# EAGLE board v1-pan (EAGLE 6.5.0)
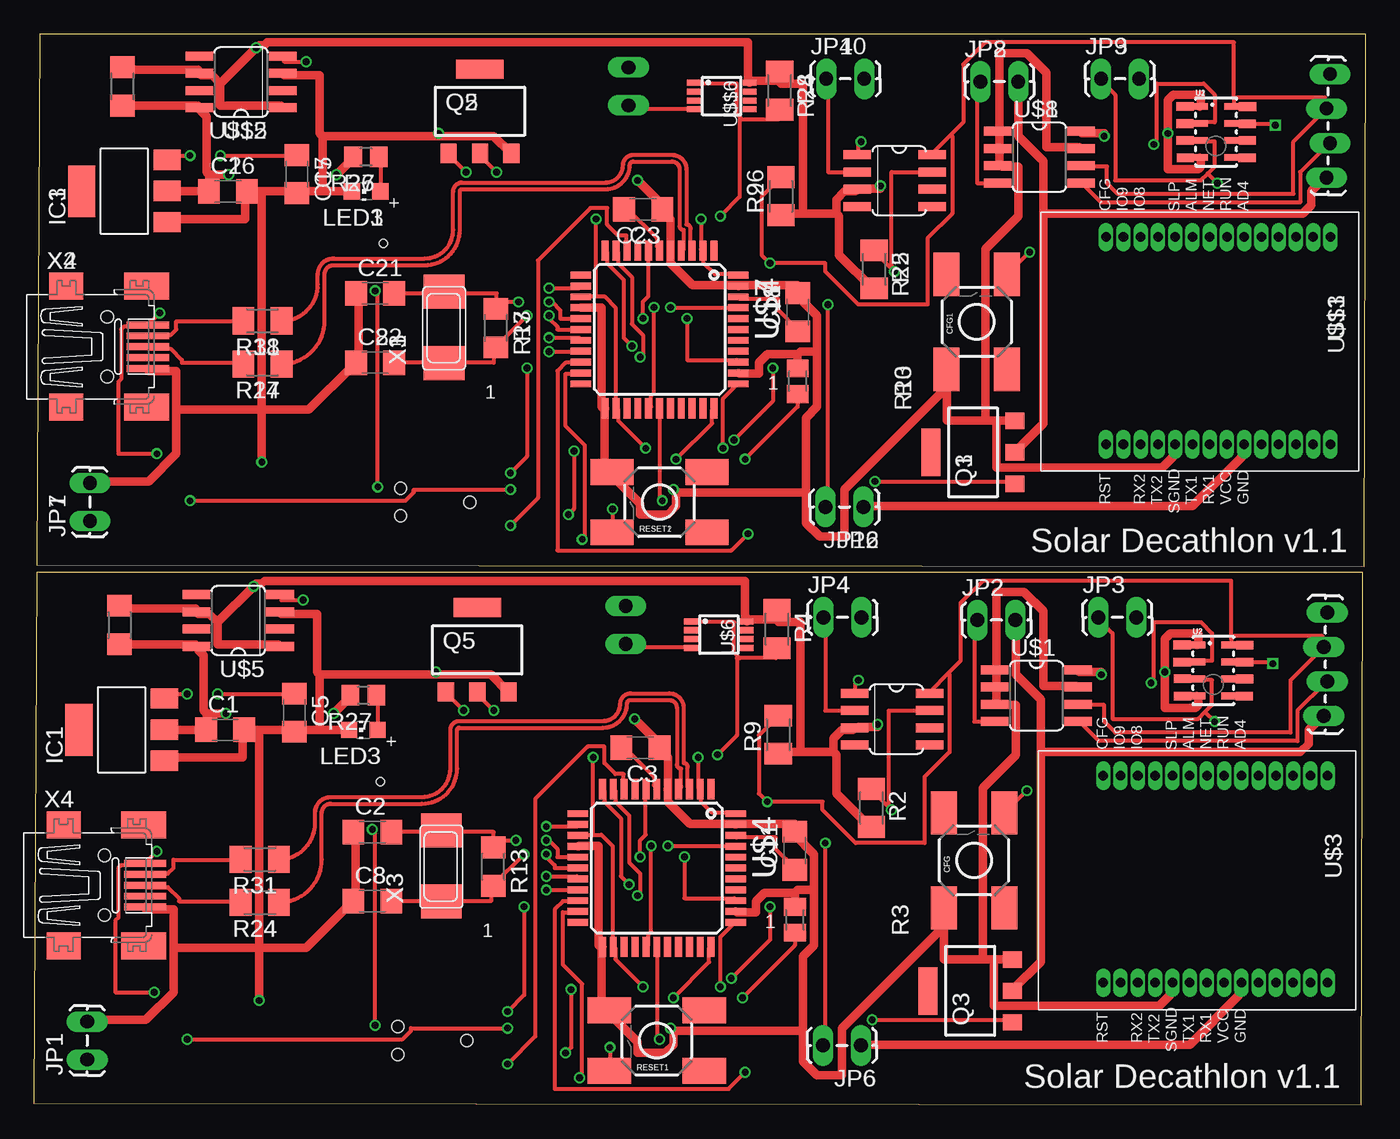
[diagram p0: board, top side]
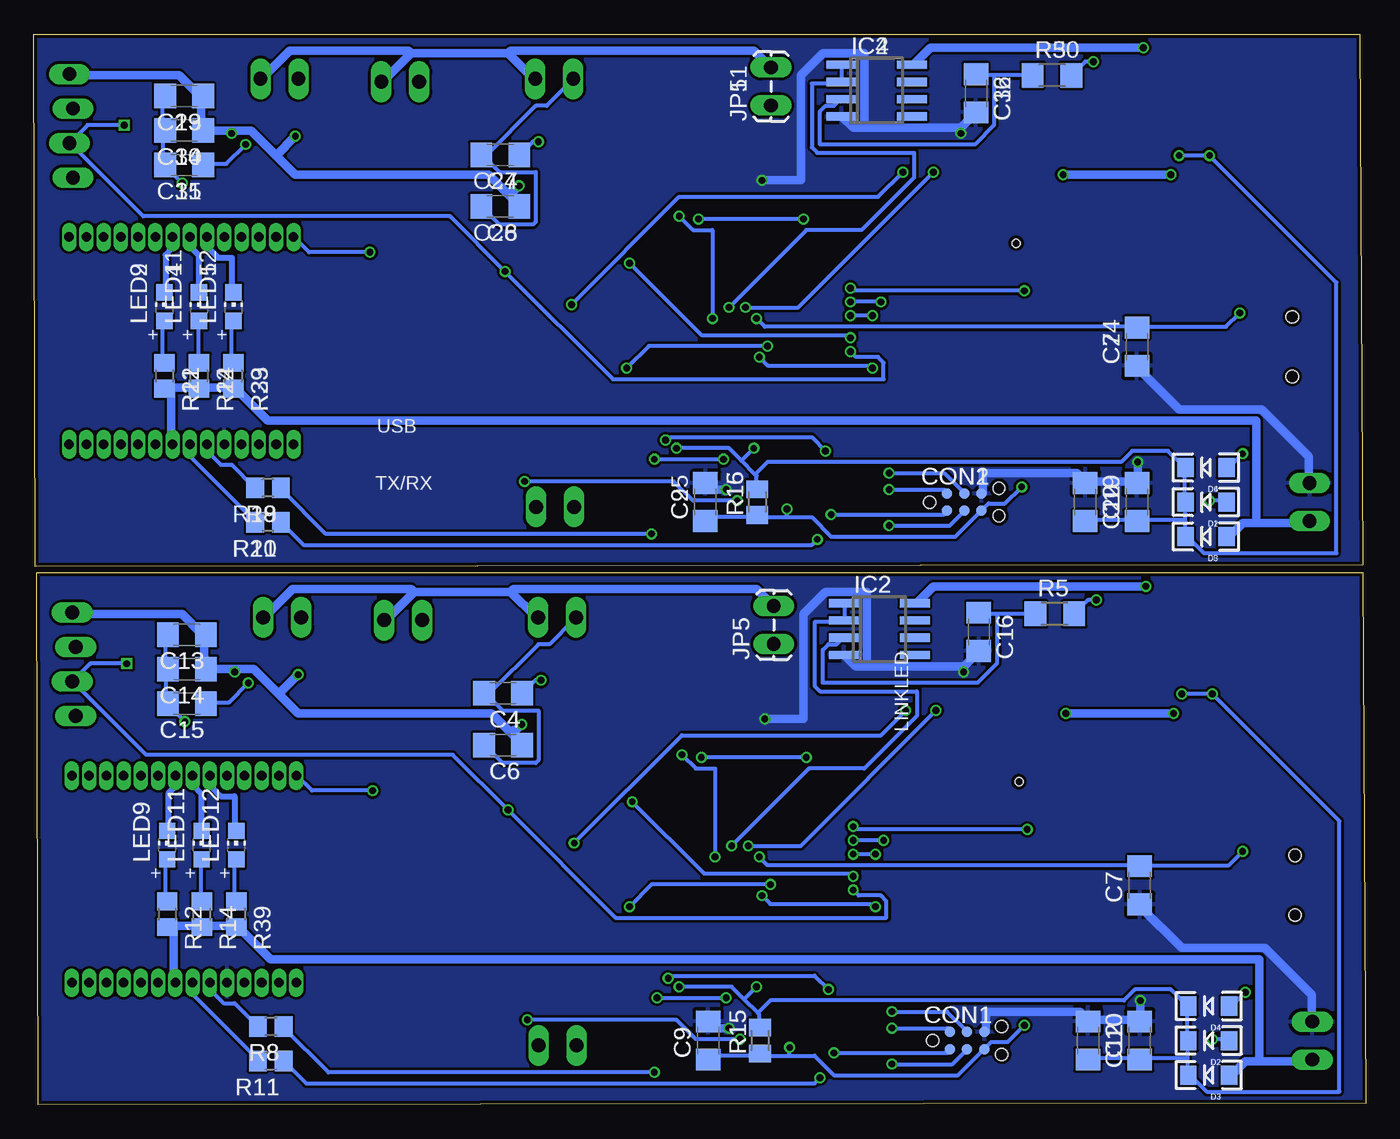
[diagram p1: board, bottom side, seen from below]

Size 97.97 x 78.78 mm. Coordinates in mm from the lower left corner, seen from the top.
Outline: 0,0.1 97.66,0 97.76,39.16 0.2,39.16 0,0.1
Outline: 0.2,39.73 97.87,39.62 97.97,78.78 0.41,78.78 0.2,39.73
Copper layers (1*16): Top 0.035mm / dielectric 1.5mm / Bottom 0.035mm
Design rules "Fusion_eagle_rule_v1.1 *": minimum track width 6mil, minimum drill 0.5mm, track to track 7.5mil, track to pad 7.5mil, pad to pad 7.5mil, via to via 7.5mil, smd to smd 0mil, copper to edge 10mil, drill to drill 10mil, minimum pad ring 6mil, minimum via ring 6mil, stop-mask expansion 2mil, vias tented up to drill 100mil, thermal gap 10mil
Net classes: 0 default: width 0.305 mm; 1 power: width 0.61 mm; 2 VIN: width 0.457 mm; 3 fine: width 0.305 mm; 4 aref: width 0.305 mm
Holes 0.6 mm at 25.5,23.77 25.7,63.4
vRestrict: area 38.2,20 to 53.4,25; area 38.2,9.8 to 53.4,14.9; area 48.4,9.8 to 53.4,25; area 38.2,9.8 to 43.3,25; area 25.5,0.9 to 34.4,8.5; area 38.4,59.6 to 53.6,64.7; area 38.4,49.4 to 53.6,54.5; area 48.6,49.4 to 53.6,64.7; area 38.4,49.4 to 43.5,64.7; area 25.7,40.5 to 34.6,48.2

## Footprints (pad centres in the part's own frame; a part is rotated, then mirrored left to right if it is on the bottom)
C1206 = smd 1.6 x 1.8: 1 -1.4,0; 2 1.4,0
TACTILE_SWITCH_SMD = smd 3.175 x 1.905: 1 -3.493,2.223; 2 3.493,2.223; 3 -3.493,-2.223; 4 3.493,-2.223
TC2030-MCP-NL = smd 0.787 x 0.787: 5V 1.27,0.635; GND 3.81,0.635; MISO 1.27,-0.635; MOSI 2.54,0.635; RESET 3.81,-0.635; SCK 2.54,-0.635 | hole 0.889: 0,0; 5.08,-1.016; 5.08,1.016
LED-1206 = smd 1.2 x 1.4: A -1.5,0; C 1.5,0
SOT223 = smd 1.499 x 2.007: 1 -2.261,-3.15; 2 0.025,-3.15; 3 2.311,-3.15 | smd 3.81 x 2.007: 4 0,3.15
SO08 = smd 0.6 x 2.2: 1 -1.905,-2.6; 2 -0.635,-2.6; 3 0.635,-2.6; 4 1.905,-2.6; 5 1.905,2.6; 6 0.635,2.6; 7 -0.635,2.6; 8 -1.905,2.6
1X02_LOCK_LONGPADS = drill 1.016 long: 1 -0.127,0; 2 2.667,0
1X04_LOCK_LONGPADS = drill 1.016 long: 1 0,0; 2 2.54,-0.254; 3 5.08,0; 4 7.62,-0.254
CHIP-LED0805 = smd 1.2 x 1.2: A 0,-1.05; C 0,1.05
PG-SOT-223 = smd 1.2 x 1.4: 1 -2.311,-3.099; 2 0,-3.099; 3 2.311,-3.099 | smd 3.5 x 1.4: 4 0,3.099
R1206 = smd 1.6 x 1.803: 1 -1.422,0; 2 1.422,0
M1206 = smd 1.6 x 2: 1 -1.4,0; 2 1.4,0
M0805 = smd 1.3 x 1.6: 1 -0.95,0; 2 0.95,0
R0805 = smd 1.3 x 1.5: 1 -0.95,0; 2 0.95,0
LGA8 = smd 1.2 x 0.5: 1 -1.2,1.875; 2 -1.2,0.625; 3 -1.2,-0.625; 4 -1.2,-1.875; 5 1.2,-1.875; 6 1.2,-0.625; 7 1.2,0.625; 8 1.2,1.875 | smd 1.27 x 0.635: P$1 -2.286,1.876; P$2 2.313,1.867; P$3 2.301,0.605; P$4 2.299,-0.617; P$5 2.29,-1.898; P$6 -2.297,0.609; P$7 -2.281,-0.609; P$8 -2.264,-1.901
SO8 = smd 0.66 x 2.032: 1 -3.81,-3.073; 2 -2.54,-3.073; 3 -1.27,-3.073; 4 0,-3.073; 5 0,3.073; 6 -1.27,3.073; 7 -2.54,3.073; 8 -3.81,3.073
CHIPCAP = smd 0.66 x 2.032: 1 -2.54,-3.073; 2 -1.27,-3.073; 3 0,-3.073; 4 1.27,-3.073; 5 1.27,2.438; 6 0,2.438; 7 -1.27,2.438; 8 -2.54,2.438
SZ05-ZIGBEE4 = drill 0.7 pad 1.016 long: AD1 -6.985,6.35; AD2 -6.985,5.08; AD3 -6.985,3.81; AD4 -6.985,2.54; ALM -6.985,-1.27; C485 -6.985,-3.81; CFG -6.985,-7.62; GND 8.255,2.54; IO1 -6.985,8.89; IO2 -6.985,7.62; IO3 8.255,8.89; IO4 8.255,7.62; IO5 8.255,6.35; IO6 8.255,5.08; IO7 8.255,3.81; IO8 -6.985,-5.08; IO9 -6.985,-6.35; MS 8.255,-6.35; NET -6.985,0; RST 8.255,-7.62; RUN -6.985,1.27; RX1 8.255,0; RX2 8.255,-5.08; SLD -6.985,-2.54; SND 8.255,-2.54; TX1 8.255,-1.27; TX2 8.255,-3.81; VCC 8.255,1.27
TQFP44 = smd 1.5 x 0.5: 1 -5.8,4; 2 -5.8,3.2; 3 -5.8,2.4; 4 -5.8,1.6; 5 -5.8,0.8; 6 -5.8,0; 7 -5.8,-0.8; 8 -5.8,-1.6; 9 -5.8,-2.4; 10 -5.8,-3.2; 11 -5.8,-4; 23 5.8,-4; 24 5.8,-3.2; 25 5.8,-2.4; 26 5.8,-1.6; 27 5.8,-0.8; 28 5.8,0; 29 5.8,0.8; 30 5.8,1.6; 31 5.8,2.4; 32 5.8,3.2; 33 5.8,4 | smd 0.5 x 1.5: 12 -4,-5.8; 13 -3.2,-5.8; 14 -2.4,-5.8; 15 -1.6,-5.8; 16 -0.8,-5.8; 17 0,-5.8; 18 0.8,-5.8; 19 1.6,-5.8; 20 2.4,-5.8; 21 3.2,-5.8; 22 4,-5.8; 34 4,5.8; 35 3.2,5.8; 36 2.4,5.8; 37 1.6,5.8; 38 0.8,5.8; 39 0,5.8; 40 -0.8,5.8; 41 -1.6,5.8; 42 -2.4,5.8; 43 -3.2,5.8; 44 -4,5.8
µSOP8 = smd 0.45 x 1: 1 -0.975,-2.05; 2 -0.325,-2.05; 3 0.325,-2.05; 4 0.975,-2.05; 5 0.975,2.05; 6 0.325,2.05; 7 -0.325,2.05; 8 -0.975,2.05
NX6035 = smd 2.5 x 3: P$1 2.665,0; P$2 -2.565,0
32005-201 = smd 3.1 x 0.5: 1 3,1.6; 2 3,0.8; 3 3,0; 4 3,-0.8; 5 3,-1.6 | smd 2.5 x 2: M1 -3,-4.45; M2 -3,4.45 | smd 3.3 x 2: M3 2.9,4.45; M4 2.9,-4.45 | hole 0.9: 0,2.2; 0,-2.2

## Placement (x,y rotation side)
C1  10uF  [C1206]  14.07,27.58 0 top
C2  22pF  [C1206]  24.89,20.07 0 top
C3  100nF  [C1206]  44.62,26.26 180 top
C4  100nF  [C1206]  63.45,30.28 180 bottom
C5  10uF  [C1206]  19.15,28.85 270 top
C6  220nF  [C1206]  63.45,26.47 180 bottom
C7  10uF  [C1206]  16.61,16.15 90 bottom
C8  22pF  [C1206]  24.89,14.99 0 top
C9  100nF  [C1206]  48.36,4.72 90 bottom
C10  10uF  [C1206]  16.61,4.72 90 bottom
C11  100nF  [C1206]  55.98,18.69 90 top
C12  100nF  [C1206]  20.42,4.72 270 bottom
C13  100nF  [C1206]  86.72,34.59 180 bottom
C14  10uF  [C1206]  86.72,32.05 180 bottom
C15  100nF  [C1206]  86.72,29.51 180 bottom
C16  150nF  [C1206]  28.45,34.8 270 bottom
C17  10uF  [C1206]  19.35,68.48 270 top
C18  100nF  [C1206]  56.18,58.32 90 top
C19  10uF  [C1206]  16.81,44.35 90 bottom
C20  100nF  [C1206]  20.62,44.35 270 bottom
C21  22pF  [C1206]  25.1,59.69 0 top
C22  22pF  [C1206]  25.1,54.61 0 top
C23  100nF  [C1206]  44.82,65.89 180 top
C24  10uF  [C1206]  16.81,55.78 90 bottom
C25  100nF  [C1206]  48.56,44.35 90 bottom
C26  10uF  [C1206]  14.27,67.21 0 top
C27  100nF  [C1206]  63.65,69.9 180 bottom
C28  220nF  [C1206]  63.65,66.09 180 bottom
C29  100nF  [C1206]  86.92,74.22 180 bottom
C30  10uF  [C1206]  86.92,71.68 180 bottom
C31  100nF  [C1206]  86.92,69.14 180 bottom
C32  150nF  [C1206]  28.65,74.42 270 bottom
CFG  Configure  [TACTILE_SWITCH_SMD]  69.16,17.98 90 top
CFG1  Configure  [TACTILE_SWITCH_SMD]  69.37,57.61 90 top
CON1  SPI  [TC2030-MCP-NL]  31.85,4.72 0 bottom
CON2  SPI  [TC2030-MCP-NL]  32.05,44.35 0 bottom
D1  1N581D1206  [LED-1206]  11.73,44.35 180 bottom
D2  1N581D1206  [LED-1206]  11.53,4.72 180 bottom
D3  1N581D1206  [LED-1206]  11.53,2.18 180 bottom
D4  1N581D1206  [LED-1206]  11.53,7.26 180 bottom
D5  1N581D1206  [LED-1206]  11.73,41.81 180 bottom
D6  1N581D1206  [LED-1206]  11.73,46.89 180 bottom
IC1  REG1117  [SOT223]  6.45,27.58 90 top
IC2  TL072D  [SO08]  35.76,35 270 bottom
IC3  REG1117  [SOT223]  6.65,67.21 90 top
IC4  TL072D  [SO08]  35.97,74.63 270 bottom
JP1  [1X02_LOCK_LONGPADS]  3.91,3.45 90 top
JP2  [1X02_LOCK_LONGPADS]  69.55,35.66 0 top
JP3  [1X02_LOCK_LONGPADS]  78.44,35.86 0 top
JP4  [1X02_LOCK_LONGPADS]  58.22,35.86 0 top
JP5  [1X02_LOCK_LONGPADS]  43.54,34.04 90 bottom
JP6  [1X02_LOCK_LONGPADS]  60.71,4.37 180 top
JP7  [1X02_LOCK_LONGPADS]  4.11,43.08 90 top
JP8  [1X02_LOCK_LONGPADS]  69.75,75.29 0 top
JP9  [1X02_LOCK_LONGPADS]  78.64,75.49 0 top
JP10  [1X02_LOCK_LONGPADS]  58.42,75.49 0 top
JP11  [1X02_LOCK_LONGPADS]  43.74,73.66 90 bottom
JP12  [1X02_LOCK_LONGPADS]  60.91,43.99 180 top
JP13  [1X04_LOCK_LONGPADS]  95.15,36.22 270 top
JP14  [1X04_LOCK_LONGPADS]  95.35,75.84 270 top
LED1  RED  [CHIP-LED0805]  24.43,67.21 90 top
LED2  RED  [CHIP-LED0805]  88.37,58.72 0 bottom
LED3  RED  [CHIP-LED0805]  24.23,27.58 90 top
LED4  RED  [CHIP-LED0805]  85.83,58.72 0 bottom
LED5  RED  [CHIP-LED0805]  83.29,58.72 0 bottom
LED9  RED  [CHIP-LED0805]  88.16,19.1 0 bottom
LED11  RED  [CHIP-LED0805]  85.62,19.1 0 bottom
LED12  RED  [CHIP-LED0805]  83.08,19.1 0 bottom
Q1  BSP75  [PG-SOT-223]  69.09,48.01 90 top
Q2  BSP75  [PG-SOT-223]  32.82,73.1 0 top
Q3  BSP75  [PG-SOT-223]  68.88,8.38 90 top
Q5  BSP75  [PG-SOT-223]  32.61,33.48 0 top
R1  50m  [R1206]  6.3,35.31 90 top
R2  10k  [M1206]  61.62,21.84 270 top
R3  10k  [M0805]  55.98,13.61 270 top
R4  4.7k  [M1206]  54.66,35 270 top
R5  10k  [R1206]  22.86,36.12 0 bottom
R6  1K  [R0805]  24.43,69.75 180 top
R7  1M  [R1206]  33.99,57.15 270 top
R8  1K  [R0805]  80.54,5.77 180 bottom
R9  10k  [M1206]  54.76,27.23 90 top
R10  10k  [M0805]  56.18,53.24 270 top
R11  1K  [R0805]  80.54,3.23 180 bottom
R12  1K  [R0805]  88.16,14.02 270 bottom
R13  1M  [R1206]  33.78,17.53 270 top
R14  1K  [R0805]  85.62,14.02 270 bottom
R15  10k  [M0805]  44.55,4.72 90 bottom
R16  10k  [M0805]  44.75,44.35 90 bottom
R17  22  [M1206]  16.81,54.51 180 top
R18  22  [M1206]  16.81,57.68 180 top
R19  1K  [R0805]  80.75,45.39 180 bottom
R20  1K  [R0805]  80.75,42.85 180 bottom
R21  1K  [R0805]  88.37,53.64 270 bottom
R22  1K  [R0805]  85.83,53.64 270 bottom
R23  1K  [R0805]  83.29,53.64 270 bottom
R24  22  [M1206]  16.61,14.88 180 top
R25  10k  [M1206]  61.82,61.47 270 top
R26  10k  [M1206]  54.97,66.85 90 top
R27  1K  [R0805]  24.23,30.12 180 top
R28  4.7k  [M1206]  54.86,74.63 270 top
R29  50m  [R1206]  6.5,74.93 90 top
R30  10k  [R1206]  23.06,75.74 0 bottom
R31  22  [M1206]  16.61,18.06 180 top
R39  1K  [R0805]  83.08,14.02 270 bottom
RESET1  Reset uC  [TACTILE_SWITCH_SMD]  45.82,4.72 180 top
RESET2  Reset uC  [TACTILE_SWITCH_SMD]  46.02,44.35 180 top
U1  MPL3115A2LGA8  [LGA8]  86.97,71.58 0 top
U2  MPL3115A2LGA8  [LGA8]  86.77,31.95 0 top
U$1  M24512  [SO8]  73.76,28.19 270 top
U$2  CHIPCAP  [CHIPCAP]  63.45,27.74 270 top
U$3  SZ05-ZIGBEETHROUGHHOLE  [SZ05-ZIGBEE4]  86.3,17.23 270 top
U$4  ATMEGA32U4-AU  [TQFP44]  45.82,17.42 270 top
U$5  MAX4376F  [SO8]  15.04,37.54 90 top
U$6  DS1820  [µSOP8]  50.39,34.59 270 top
U$7  ATMEGA32U4-AU  [TQFP44]  46.02,57.05 270 top
U$8  M24512  [SO8]  73.96,67.82 270 top
U$9  CHIPCAP  [CHIPCAP]  63.65,67.36 270 top
U$10  DS1820  [µSOP8]  50.6,74.22 270 top
U$11  SZ05-ZIGBEETHROUGHHOLE  [SZ05-ZIGBEE4]  86.5,56.86 270 top
U$12  MAX4376F  [SO8]  15.24,77.17 90 top
X1  16MHz  [NX6035]  30.18,57.15 90 top
X2  MINI-USB  [32005-201]  5.38,55.78 0 top
X3  16MHz  [NX6035]  29.97,17.53 90 top
X4  MINI-USB  [32005-201]  5.18,16.15 0 top

## Library data of the parts
C1-C32 R1 R5-R8 R11-R14 R19-R23 R27 R29 R30 R39 = rcl
CFG CFG1 CON1 CON2 D1-D6 RESET1 RESET2 U$1-U$3 U$5 U$8 U$9 U$11 U$12 X1 X3 = lpatiny
IC1 IC3 = burr-brown; MPN: REG1117; OC_FARNELL: 1097566; OC_NEWARK: 14P6981
IC2 IC4 = linear
JP1-JP14 = SparkFun
LED1-LED5 LED9 LED11 LED12 U$4 U$7 = adafruit
Q1-Q3 Q5 = infineon; OC_FARNELL: unknown; OC_NEWARK: unknown
R2-R4 R9 R10 R15-R18 R24-R26 R28 R31 = resistor
U1 U2 = SparkFun-Sensors-hacked
U$6 U$10 = Ava
X2 X4 = con-cypressindustries; OC_FARNELL: unknown; OC_NEWARK: unknown

## Nets
3.3IN [power]: C1.1 IC1.2 R1.1 R27.2 U$5.8
3.3IN1 [power]: C26.1 IC3.2 R6.2 R29.1 U$12.8
3.3V [power]: C6.1 C13.1 C14.1 IC2.8 JP13.1 R1.2 R2.2 R4.1 R9.1 U2.1 U2.4 U$1.8 U$2.3 U$5.1 U$5.6 U$6.8
3.3V1 [power]: C28.1 C29.1 C30.1 IC4.8 JP14.1 R25.2 R26.1 R28.1 R29.2 U1.1 U1.4 U$8.8 U$9.3 U$10.8 U$12.1 U$12.6
$1: C13.2 C14.2 C15.2 JP3.1 U2.3
$2: C4.2 C6.2 JP4.1 U$2.2
$3: JP5.1 U$6.4
$4: JP8.1 U$8.4
$5: JP11.1 U$10.4
$6: C29.2 C30.2 C31.2 JP9.1 U1.3
$7: C27.2 C28.2 JP10.1 U$9.2
$12: JP2.1 U$1.4
+5V [power]: D3.A JP1.1 R12.2 R14.2 R39.2 U$3.VCC
+5V1 [power]: D5.A JP7.1 R21.2 R22.2 R23.2 U$11.VCC
A0: R4.2 U$4.36 U$6.1
A1: U$4.37
A2: U$4.38
A3: U$4.39
A4: U$4.40
A5: IC2.1 IC2.2 U$4.41
A6: U$7.38
A7: U$7.39
A8: U$7.40
A9: IC4.1 IC4.2 U$7.41
A10: U$7.37
A11: R28.2 U$7.36 U$10.1
AREF: C11.1 U$4.42
AREF1: C18.1 U$7.42
CS: U$4.25
CS1: U$7.25
D5*: U$4.31
D5*1: U$7.31
D6*: Q5.1 U$4.27
D6*1: Q2.1 U$7.27
D7*: U$4.1
D7*1: U$7.1
D8*: Q3.1 U$4.28
D8*1: Q1.1 U$7.28
D9*: U$4.29
D9*1: U$7.29
D10*: U$4.30
D10*1: U$7.30
D11*: U$4.12
D11*1: U$7.12
D12*: U$4.26
D12*1: U$7.26
D13*: U$4.32
D13*1: U$7.32
D+USB: R24.2 X4.3
D+USB1: R17.2 X2.3
D-USB: R31.2 X4.2
D-USB1: R18.2 X2.2
GND [power]: C1.2 C2.1 C3.1 C5.2 C7.1 C8.1 C9.2 C10.2 C11.2 C12.1 C16.2 CFG.1 CON1.GND IC1.1 IC2.4 JP1.2 LED3.C Q3.3 Q5.3 R3.1 RESET1.4 U$1.1 U$1.2 U$1.3 U$1.7 U$3.SND U$4.5 U$4.15 U$4.23 U$4.35 U$4.43 U$5.3 X4.5
GND1 [VIN]: LED9.C U$3.RUN
GND2 [VIN]: LED11.C U$3.NET
GND3 [VIN]: LED12.C U$3.ALM
GND4 [power]: C17.2 C18.2 C19.2 C20.1 C21.1 C22.1 C23.1 C24.1 C25.2 C26.2 C32.2 CFG1.1 CON2.GND IC3.1 IC4.4 JP7.2 LED1.C Q1.3 Q2.3 R10.1 RESET2.4 U$7.5 U$7.15 U$7.23 U$7.35 U$7.43 U$8.1 U$8.2 U$8.3 U$8.7 U$11.SND U$12.3 X2.5
GND5 [VIN]: LED2.C U$11.RUN
GND6 [VIN]: LED4.C U$11.NET
GND7 [VIN]: LED5.C U$11.ALM
GND_CONTROLLED [power]: JP2.2 JP3.2 JP4.2 JP5.2 JP13.4 Q3.2
GND_CONTROLLED1 [power]: JP8.2 JP9.2 JP10.2 JP11.2 JP14.4 Q1.2
HWB: R3.2 U$4.33
HWB1: R10.2 U$7.33
ISP+5V: CON1.5V D2.A
ISP+5V1: CON2.5V D1.A
MISO: CON1.MISO U$4.11
MISO1: CON2.MISO U$7.11
MOSI: CON1.MOSI U$4.10
MOSI1: CON2.MOSI U$7.10
N$1: R5.2 U$5.4
N$2: JP6.2 Q5.2
N$3: C16.1 IC2.3 R5.1
N$4: C22.2 R7.2 U$7.17 X1.P$2
N$5: LED1.A R6.1
N$6: C4.1 U$2.1
N$7: C23.2 U$7.6
N$8 [power]: JP6.1 U$3.GND
N$9: R20.2 U$11.RX1
N$10: R19.2 U$11.TX1
N$11: R11.2 U$3.RX1
N$12: LED2.A R21.1
N$13: C15.1 U2.2
N$14: LED4.A R22.1
N$15: LED5.A R23.1
N$16: C3.2 U$4.6
N$17: CFG1.4 U$11.CFG
N$18: C27.1 U$9.1
N$19: C31.1 U1.2
N$20: LED3.A R27.1
N$21 [power]: JP12.1 U$11.GND
N$22: JP12.2 Q2.2
N$23: R30.2 U$12.4
N$24: R8.2 U$3.TX1
N$25: LED9.A R12.1
N$26: LED11.A R14.1
N$27: LED12.A R39.1
N$28: C32.1 IC4.3 R30.1
N$35: CFG.4 U$3.CFG
N$42: C8.2 R13.2 U$4.17 X3.P$2
RD_N: R31.1 U$4.3
RD_N1: R18.1 U$7.3
RD_P: R24.1 U$4.4
RD_P1: R17.1 U$7.4
RESET: C9.1 CON1.RESET R15.1 RESET1.2 U$4.13
RESET1: C25.1 CON2.RESET R16.1 RESET2.2 U$7.13
RX: R8.1 U$4.20
RX1: R19.1 U$7.20
RXLED: U$4.8
RXLED1: U$7.8
SCK: CON1.SCK U$4.9
SCK1: CON2.SCK U$7.9
SCL: JP13.2 R9.2 U2.8 U$1.6 U$2.8 U$4.18
SCL1: JP14.2 R26.2 U1.8 U$7.18 U$8.6 U$9.8
SDA: JP13.3 R2.1 U2.7 U$1.5 U$2.7 U$4.19
SDA1: JP14.3 R25.1 U1.7 U$7.19 U$8.5 U$9.7
TX: R11.1 U$4.21
TX1: R20.1 U$7.21
TXLED: U$4.22
TXLED1: U$7.22
VCC [fine]: C5.1 C10.1 C12.2 D2.C D3.C D4.C IC1.3 R15.2 U$4.2 U$4.14 U$4.24 U$4.34 U$4.44
VCC1 [fine]: C17.1 C19.1 C20.2 D1.C D5.C D6.C IC3.3 R16.2 U$7.2 U$7.14 U$7.24 U$7.34 U$7.44
VUSB: C7.2 D4.A U$4.7 X4.1
VUSB1: C24.2 D6.A U$7.7 X2.1
XTAL1: C2.2 R13.1 U$4.16 X3.P$1
XTAL2: C21.2 R7.1 U$7.16 X1.P$1

## Tracks (layer width: path | path; a pad name or v marks a point on that pad's centre or on a via)
3.3IN  (via drill 0.5)
  Top 0.61: R1.1 6.4,33.88 11.89,33.88 U$5.8 12.09,33.48 12.5,33.07 12.5,29.01 12.7,28.8 | v22.05,28.8 23.27,30.02 R27.2 | 12.7,28.8 v14.12,28.8 | 12.7,28.8 12.7,27.58 C1.1 9.65,27.58 IC1.2
  Bottom 0.61: v14.12,28.8 v22.05,28.8
3.3IN1  (via drill 0.5)
  Top 0.61: R29.1 6.6,73.51 12.09,73.51 U$12.8 12.29,73.1 12.7,72.69 12.7,68.63 12.9,68.43 | v22.25,68.43 23.47,69.65 R6.2 | 12.9,68.43 v14.33,68.43 | 12.9,68.43 12.9,67.21 C26.1 9.86,67.21 IC3.2
  Bottom 0.61: v14.33,68.43 v22.25,68.43
3.3V  (via drill 0.5)
  Top 0.61: R1.2 6.4,36.53 11.89,36.53 11.89,36.32 U$5.6 12.09,36.12 12.9,36.12 13.51,35.51 | 13.51,35.51 13.51,33.88 17.98,33.88 U$5.1 | 13.51,35.51 v16.15,38.15 16.36,38.35 16.76,38.35 16.97,38.56 52.32,38.56 52.32,35.92 52.53,35.71 | 54.56,35.71 52.53,35.71 | 54.56,35.71 54.56,36.32 R4.1 | 52.53,35.71 U$6.8 | 58.83,25.96 56.39,25.96 | 56.39,25.96 54.76,25.96 R9.1 | 58.83,25.96 58.83,26.97 59.44,27.58 60.25,27.58 U$2.3 60.66,27.79 62.08,27.79 v62.08,27.99 | R2.2 61.47,20.47 59.03,22.91 59.03,25.76 58.83,25.96 | 56.39,25.96 56.39,35.51 54.76,35.51 54.56,35.71 | U2.4 85.65,30.02 85.65,29.41 85.45,29.21 83.21,29.21 v83.21,31.85 83.21,34.29 83.62,34.7 85.65,34.7 85.65,33.88 U2.1 | v78.54,31.65 78.54,31.85 76.91,31.85 U$1.8
  Bottom 0.61: v16.15,38.15 31.8,38.15 33.02,36.93 IC2.8 | 62.89,27.38 64.31,28.8 78.54,28.8 79.96,30.23 | 62.89,27.38 62.08,26.57 C6.1 | 79.96,30.23 81.79,32.05 83.21,32.05 | 83.21,32.05 C14.1 85.45,32.26 85.45,34.49 C13.1 85.65,34.7 87.07,36.12 95,36.12 JP13.1 | 79.96,30.23 v78.54,31.65 | v83.21,31.85 83.21,32.05 | v62.08,27.99 62.48,27.58 62.69,27.58 62.89,27.38
3.3V1  (via drill 0.5)
  Top 0.61: R29.2 6.6,76.15 12.09,76.15 12.09,75.95 U$12.6 12.29,75.74 13.11,75.74 13.72,75.13 | 13.72,75.13 13.72,73.51 18.19,73.51 U$12.1 | 13.72,75.13 v16.36,77.77 16.56,77.98 16.97,77.98 17.17,78.18 52.53,78.18 52.53,75.54 52.73,75.34 | 54.76,75.34 52.73,75.34 | 54.76,75.34 54.76,75.95 R28.1 | 52.73,75.34 U$10.8 | 59.03,65.58 56.59,65.58 | 56.59,65.58 54.97,65.58 R26.1 | 59.03,65.58 59.03,66.6 59.64,67.21 60.45,67.21 U$9.3 60.86,67.41 62.28,67.41 v62.28,67.61 | R25.2 61.67,60.1 59.23,62.53 59.23,65.38 59.03,65.58 | 56.59,65.58 56.59,75.13 54.97,75.13 54.76,75.34 | U1.4 85.85,69.65 85.85,69.04 85.65,68.83 83.41,68.83 v83.41,71.48 83.41,73.91 83.82,74.32 85.85,74.32 85.85,73.51 U1.1 | v78.74,71.27 78.74,71.48 77.11,71.48 U$8.8
  Bottom 0.61: v16.36,77.77 32,77.77 33.22,76.56 IC4.8 | 63.09,67.01 64.52,68.43 78.74,68.43 80.16,69.85 | 63.09,67.01 62.28,66.19 C28.1 | 80.16,69.85 81.99,71.68 83.41,71.68 | 83.41,71.68 C30.1 85.65,71.88 85.65,74.12 C29.1 85.85,74.32 87.27,75.74 95.2,75.74 JP14.1 | 80.16,69.85 v78.74,71.27 | v83.41,71.48 83.41,71.68 | v62.28,67.61 62.69,67.21 62.89,67.21 63.09,67.01
$1  (via drill 0.5)
  Top 0.305: 86.16,28.91 85.65,28.4 79.35,28.4 79.35,34.7 78.33,35.71 JP3.1 | 86.16,28.91 86.66,29.41 86.66,31.24 85.65,31.24 U2.3 | 86.16,28.91 v86.87,28.19
  Bottom 0.305: 88.29,32.05 88.29,29.62 C15.2 88.09,29.41 v86.87,28.19 | 88.29,32.05 88.29,34.49 C13.2 | 88.29,32.05 C14.2
$2
  Top 0.305: U$2.2 58.22,29.01 58.22,35.71 JP4.1
  Bottom 0.305: C6.2 64.72,26.37 63.5,25.15 61.06,25.15 60.86,25.35 60.86,29.01 63.5,29.01 64.72,30.23 C4.2 64.52,30.23 60.86,33.88 60.05,33.88 58.22,35.71 JP4.1
$3
  Top 0.305: U$6.4 48.26,33.68 43.59,33.68 43.59,33.88 JP5.1
$4
  Top 0.305: U$8.4 69.39,67.82 69.39,74.93 69.6,75.13 JP8.1
$5
  Top 0.305: U$10.4 48.46,73.3 43.79,73.3 43.79,73.51 JP11.1
$6  (via drill 0.5)
  Top 0.305: 86.36,68.53 85.85,68.02 79.55,68.02 79.55,74.32 78.54,75.34 JP9.1 | 86.36,68.53 86.87,69.04 86.87,70.87 85.85,70.87 U1.3 | 86.36,68.53 v87.07,67.82
  Bottom 0.305: 88.49,71.68 88.49,69.24 C31.2 88.29,69.04 v87.07,67.82 | 88.49,71.68 88.49,74.12 C29.2 | 88.49,71.68 C30.2
$7
  Top 0.305: U$9.2 58.42,68.63 58.42,75.34 JP10.1
  Bottom 0.305: C28.2 64.92,65.99 63.7,64.77 61.26,64.77 61.06,64.97 61.06,68.63 63.7,68.63 64.92,69.85 C27.2 64.72,69.85 61.06,73.51 60.25,73.51 58.42,75.34 JP10.1
$12
  Top 0.305: U$1.4 69.19,28.19 69.19,35.31 69.39,35.51 JP2.1
+5V
  Bottom 0.61: 7.82,3.2 3.96,3.2 JP1.1 | 7.82,3.2 8.84,3.2 9.86,2.18 D3.A | U$3.VCC 87.68,9.09 87.68,12.95 R12.2 88.09,13.16 85.85,13.16 R14.2 85.45,13.16 83.21,13.16 R39.2 82.8,12.95 80.57,10.72 7.82,10.72 7.82,3.2
+5V1
  Bottom 0.61: 8.03,42.82 4.17,42.82 JP7.1 | 8.03,42.82 9.04,42.82 10.06,41.81 D5.A | U$11.VCC 87.88,48.72 87.88,52.58 R21.2 88.29,52.78 86.06,52.78 R22.2 85.65,52.78 83.41,52.78 R23.2 83.01,52.58 80.77,50.34 8.03,50.34 8.03,42.82
A0  (via drill 0.5)
  Top 0.305: 51.82,32.97 51.92,32.87 54.56,32.87 54.56,33.48 R4.2 | 51.82,32.97 51.51,33.27 51.51,35.51 48.46,35.51 U$6.1 | v47.85,18.24 47.85,15.19 51.51,15.19 U$4.36 | v50.29,25.76 51.71,27.18 51.71,32.87 51.82,32.97
  Bottom 0.305: v47.85,18.24 47.85,24.74 49.28,24.74 v50.29,25.76
A5  (via drill 0.5)
  Top 0.305: v46.63,19.05 51.51,19.05 U$4.41
  Bottom 0.305: v46.63,19.05 40.94,24.74 36.88,24.74 33.02,28.6 33.02,30.43 40.13,30.43 40.54,30.84 40.54,35.51 38.51,35.51 IC2.2 38.3,35.71 38.3,36.73 IC2.1
A9  (via drill 0.5)
  Top 0.305: v46.84,58.67 51.71,58.67 U$7.41
  Bottom 0.305: v46.84,58.67 41.15,64.36 37.08,64.36 33.22,68.22 33.22,70.05 40.34,70.05 40.74,70.46 40.74,75.13 38.71,75.13 IC4.2 38.51,75.34 38.51,76.35 IC4.1
A11  (via drill 0.5)
  Top 0.305: 52.02,72.59 52.12,72.49 54.76,72.49 54.76,73.1 R28.2 | 52.02,72.59 51.71,72.9 51.71,75.13 48.67,75.13 U$10.1 | v48.06,57.86 48.06,54.81 51.71,54.81 U$7.36 | v50.5,65.38 51.92,66.8 51.92,72.49 52.02,72.59
  Bottom 0.305: v48.06,57.86 48.06,64.36 49.48,64.36 v50.5,65.38
AREF
  Top 0.305: U$4.42 51.71,19.66 54.56,19.66 54.56,18.85 55.98,17.42 C11.1
AREF1
  Top 0.305: U$7.42 51.92,59.28 54.76,59.28 54.76,58.47 56.18,57.05 C18.1
D6*  (via drill 0.5)
  Top 0.305: v31.6,29.01 30.38,30.23 Q5.1 | v45.42,19.05 45.42,12.75 45.21,12.55 45.21,11.73 U$4.27
  Bottom 0.305: v31.6,29.01 41.55,19.05 v45.42,19.05
D6*1  (via drill 0.5)
  Top 0.305: v31.8,68.63 30.58,69.85 Q2.1 | v45.62,58.67 45.62,52.37 45.42,52.17 45.42,51.36 U$7.27
  Bottom 0.305: v31.8,68.63 41.76,58.67 v45.62,58.67
D8*  (via drill 0.5)
  Top 0.305: v61.67,6.25 71.83,6.25 Q3.1 | v46.02,4.83 45.82,5.03 U$4.28
  Bottom 0.305: v61.67,6.25 50.7,6.25 49.28,4.83 v46.02,4.83
D8*1  (via drill 0.5)
  Top 0.305: v61.87,45.87 72.03,45.87 Q1.1 | v46.23,44.45 46.02,44.65 U$7.28
  Bottom 0.305: v61.87,45.87 50.9,45.87 49.48,44.45 v46.23,44.45
D+USB
  Top 0.305: R24.2 15.14,14.99 10.67,14.99 10.67,15.19 9.86,16 8.23,16 X4.3
D+USB1
  Top 0.305: R17.2 15.34,54.61 10.87,54.61 10.87,54.81 10.06,55.63 8.43,55.63 X2.3
D-USB
  Top 0.305: R31.2 15.14,18.03 10.26,18.03 10.26,17.42 9.86,17.02 8.23,17.02 X4.2
D-USB1
  Top 0.305: R18.2 15.34,57.66 10.46,57.66 10.46,57.05 10.06,56.64 8.43,56.64 X2.2
GND  (via drill 0.5)
  Top 0.61: C2.1 23.67,20.07 23.67,14.99 C8.1 23.27,14.78 20.02,11.53 16.56,11.53 | 10.26,11.53 10.26,8.28 8.23,6.25 3.96,6.25 JP1.2 | 10.26,11.53 10.26,14.38 8.23,14.38 X4.5 | 10.26,11.53 16.56,11.53 | 16.56,11.53 v16.56,7.67 | 9.65,25.35 IC1.1 9.86,25.55 15.34,25.55 15.34,27.38 C1.2 16.56,27.58 | 21.03,27.58 19.2,27.58 C5.2 19,27.58 16.56,27.58 | 21.03,27.58 LED3.C | 21.03,31.65 29.57,31.65 | 29.57,31.65 33.63,31.65 34.85,30.43 Q5.3 | 21.03,27.58 21.03,31.65 | U$5.3 18.19,36.12 20.83,36.12 20.83,31.85 21.03,31.65 | v29.57,31.85 29.57,31.65 | 16.56,27.58 16.56,11.53 | 41.76,11.53 41.76,7.47 42.16,7.06 RESET1.4 42.37,6.65 44.4,4.62 44.4,3.81 46.43,3.81 47.04,4.42 47.04,5.44 | 41.76,11.53 U$4.23 | U$4.15 40.13,19.05 41.55,19.05 41.55,11.73 41.76,11.53 | 47.04,5.44 v46.84,5.64 | 55.98,15.6 53.75,15.6 53.14,14.99 53.14,14.17 51.71,14.17 U$4.35 | R3.1 55.98,15.6 | 57.4,15.8 56.18,15.8 55.98,15.6 | 57.4,15.8 57.4,18.44 55.98,19.86 C11.2 55.98,20.68 51.71,20.68 U$4.43 51.51,20.68 48.26,20.68 46.63,22.3 46.63,23.11 U$4.5 46.63,23.32 46.63,25.55 46.02,26.16 C3.1 46.02,26.57 v44.2,28.4 | 56.59,5.44 47.04,5.44 | 56.59,5.44 56.59,10.92 57.4,11.73 57.4,15.8 | U$1.7 76.71,30.84 74.27,30.84 74.27,36.32 72.85,37.74 70.82,37.74 70.82,32.26 U$1.1 70.82,31.85 70.82,30.84 U$1.2 70.82,30.63 70.82,29.62 U$1.3 71.02,29.41 72.24,29.41 72.24,25.76 69.8,23.32 69.8,10.72 | 69.8,10.72 66.95,10.72 66.95,14.38 CFG.1 66.75,12.95 59.44,5.64 59.44,2.18 57.61,2.18 56.59,3.2 56.59,5.44 | 69.8,10.72 70.61,10.72 | 70.61,10.72 71.83,10.72 Q3.3 | 70.61,10.72 70.61,7.26 82.8,7.26 83.62,8.08 83.62,8.89 U$3.SND
  Bottom 0.61: CON1.GND 27.94,5.44 27.94,6.86 21.03,6.86 20.42,6.25 C12.1 20.22,6.25 16.76,6.25 C10.2 16.56,6.45 v16.56,7.67 | C7.1 16.56,14.58 13.51,11.53 7.42,11.53 3.96,8.08 3.96,6.25 JP1.2 | 29.57,32.26 28.55,33.27 C16.2 | 36.68,32.26 37.49,32.26 38.3,33.07 IC2.4 | 36.68,32.26 29.57,32.26 | v29.57,31.85 29.57,32.26 | v46.84,5.64 47.85,5.64 48.26,6.05 C9.2 | 36.68,32.26 36.68,37.74 39.73,37.74 41.35,36.12 41.35,28.4 v44.2,28.4
  pour Bottom: 0.2,39.17 97.94,39.17 97.94,-0.56 0.1,-0.56 0.1,39.17
GND1
  Bottom 0.457: LED9.C 88.09,20.27 88.09,22.91 87.68,23.32 87.68,24.13 U$3.RUN
GND2
  Bottom 0.457: LED11.C 85.65,20.27 85.65,22.91 86.26,23.52 86.26,24.13 U$3.NET
GND3
  Bottom 0.457: LED12.C 83.21,20.27 83.21,22.71 84.23,22.71 84.84,23.32 84.84,24.13 U$3.ALM
GND4  (via drill 0.5)
  Top 0.61: C21.1 23.88,59.69 23.88,54.61 C22.1 23.47,54.41 20.22,51.16 16.76,51.16 | 10.46,51.16 10.46,47.9 8.43,45.87 4.17,45.87 JP7.2 | 10.46,51.16 10.46,54 8.43,54 X2.5 | 10.46,51.16 16.76,51.16 | 16.76,51.16 v16.76,47.29 | 9.86,64.97 IC3.1 10.06,65.18 15.54,65.18 15.54,67.01 C26.2 16.76,67.21 | 21.23,67.21 19.41,67.21 C17.2 19.2,67.21 16.76,67.21 | 21.23,67.21 LED1.C | 21.23,71.27 29.77,71.27 | 29.77,71.27 33.83,71.27 35.05,70.05 Q2.3 | 21.23,67.21 21.23,71.27 | U$12.3 18.39,75.74 21.03,75.74 21.03,71.48 21.23,71.27 | v29.77,71.48 29.77,71.27 | 16.76,67.21 16.76,51.16 | 41.96,51.16 41.96,47.09 42.37,46.69 RESET2.4 42.57,46.28 44.6,44.25 44.6,43.43 46.63,43.43 47.24,44.04 47.24,45.06 | 41.96,51.16 U$7.23 | U$7.15 40.34,58.67 41.76,58.67 41.76,51.36 41.96,51.16 | 47.24,45.06 v47.04,45.26 | 56.18,55.22 53.95,55.22 53.34,54.61 53.34,53.8 51.92,53.8 U$7.35 | R10.1 56.18,55.22 | 57.61,55.42 56.39,55.42 56.18,55.22 | 57.61,55.42 57.61,58.06 56.18,59.49 C18.2 56.18,60.3 51.92,60.3 U$7.43 51.71,60.3 48.46,60.3 46.84,61.93 46.84,62.74 U$7.5 46.84,62.94 46.84,65.18 46.23,65.79 C23.1 46.23,66.19 v44.4,68.02 | 56.79,45.06 47.24,45.06 | 56.79,45.06 56.79,50.55 57.61,51.36 57.61,55.42 | U$8.7 76.91,70.46 74.47,70.46 74.47,75.95 73.05,77.37 71.02,77.37 71.02,71.88 U$8.1 71.02,71.48 71.02,70.46 U$8.2 71.02,70.26 71.02,69.24 U$8.3 71.22,69.04 72.44,69.04 72.44,65.38 70,62.94 70,50.34 | 70,50.34 67.16,50.34 67.16,54 CFG1.1 66.95,52.58 59.64,45.26 59.64,41.81 57.81,41.81 56.79,42.82 56.79,45.06 | 70,50.34 70.82,50.34 | 70.82,50.34 72.03,50.34 Q1.3 | 70.82,50.34 70.82,46.89 83.01,46.89 83.82,47.7 83.82,48.51 U$11.SND
  Bottom 0.61: CON2.GND 28.14,45.06 28.14,46.48 21.23,46.48 20.62,45.87 C20.1 20.42,45.87 16.97,45.87 C19.2 16.76,46.08 v16.76,47.29 | C24.1 16.76,54.2 13.72,51.16 7.62,51.16 4.17,47.7 4.17,45.87 JP7.2 | 29.77,71.88 28.75,72.9 C32.2 | 36.88,71.88 37.69,71.88 38.51,72.69 IC4.4 | 36.88,71.88 29.77,71.88 | v29.77,71.48 29.77,71.88 | v47.04,45.26 48.06,45.26 48.46,45.67 C25.2 | 36.88,71.88 36.88,77.37 39.93,77.37 41.55,75.74 41.55,68.02 v44.4,68.02
  pour Bottom: 0.41,78.79 98.15,78.79 98.15,39.07 0.3,39.07 0.3,78.79
GND5
  Bottom 0.457: LED2.C 88.29,59.89 88.29,62.53 87.88,62.94 87.88,63.75 U$11.RUN
GND6
  Bottom 0.457: LED4.C 85.85,59.89 85.85,62.53 86.46,63.14 86.46,63.75 U$11.NET
GND7
  Bottom 0.457: LED5.C 83.41,59.89 83.41,62.33 84.43,62.33 85.04,62.94 85.04,63.75 U$11.ALM
GND_CONTROLLED
  Top 0.61: 74.07,25.96 74.07,29.82 72.24,31.65 72.24,35.51 JP2.2 | 74.07,25.96 74.07,10.52 72.03,8.48 Q3.2 | 74.07,25.96 93.17,25.96 93.78,26.57 93.78,27.58 94.79,28.6 JP13.4
  Bottom 0.61: 62.89,37.74 61.06,35.92 JP4.2 | 70,37.74 62.89,37.74 | 70,37.74 72.03,35.71 JP2.2 | JP3.2 80.98,35.92 78.94,37.95 70.21,37.95 70,37.74 | JP5.2 43.59,36.73 44.81,37.95 62.69,37.95 62.89,37.74
GND_CONTROLLED1
  Top 0.61: 74.27,65.58 74.27,69.44 72.44,71.27 72.44,75.13 JP8.2 | 74.27,65.58 74.27,50.14 72.24,48.11 Q1.2 | 74.27,65.58 93.37,65.58 93.98,66.19 93.98,67.21 95,68.22 JP14.4
  Bottom 0.61: 63.09,77.37 61.26,75.54 JP10.2 | 70.21,77.37 63.09,77.37 | 70.21,77.37 72.24,75.34 JP8.2 | JP9.2 81.18,75.54 79.15,77.57 70.41,77.57 70.21,77.37 | JP11.2 43.79,76.35 45.01,77.57 62.89,77.57 63.09,77.37
HWB  (via drill 0.5)
  Top 0.305: v47.04,7.87 49.68,10.52 49.68,11.53 U$4.33 | v52.12,7.87 55.98,11.73 R3.2
  Bottom 0.305: v52.12,7.87 v47.04,7.87
HWB1  (via drill 0.5)
  Top 0.305: v47.24,47.5 49.89,50.14 49.89,51.16 U$7.33 | v52.32,47.5 56.18,51.36 R10.2
  Bottom 0.305: v52.32,47.5 v47.24,47.5
ISP+5V  (via drill 0.5)
  Top 0.305: v34.85,5.64 27.74,5.64 27.74,5.44 27.13,4.83 v11.28,4.83
  Bottom 0.305: v34.85,5.64 30.78,5.64 30.58,5.44 CON1.5V | v11.28,4.83 10.06,4.83 D2.A
ISP+5V1  (via drill 0.5)
  Top 0.305: v35.05,45.26 27.94,45.26 27.94,45.06 27.33,44.45 v11.48,44.45
  Bottom 0.305: v35.05,45.26 30.99,45.26 30.78,45.06 CON2.5V | v11.48,44.45 10.26,44.45 D1.A
MISO  (via drill 0.5)
  Top 0.305: v39.12,3.81 39.52,4.22 v39.52,8.48 | v51.31,9.3 54.15,12.14 v54.15,14.58 | v43.79,16.21 43.18,16.81 43.18,21.08 41.96,22.3 41.96,23.11 U$4.11
  Bottom 0.305: v39.12,3.81 30.78,3.81 30.58,4.01 CON1.MISO | v39.52,8.48 40.54,9.5 51.1,9.5 v51.31,9.3 | v54.15,14.58 52.53,16.21 v43.79,16.21
MISO1  (via drill 0.5)
  Top 0.305: v39.32,43.43 39.73,43.84 v39.73,48.11 | v51.51,48.92 54.36,51.77 v54.36,54.2 | v43.99,55.83 43.38,56.44 43.38,60.71 42.16,61.93 42.16,62.74 U$7.11
  Bottom 0.305: v39.32,43.43 30.99,43.43 30.78,43.64 CON2.MISO | v39.73,48.11 40.74,49.12 51.31,49.12 v51.51,48.92 | v54.36,54.2 52.73,55.83 v43.99,55.83
MOSI  (via drill 0.5)
  Top 0.305: v34.85,6.86 36.07,8.08 v36.07,14.58 | v44.4,15.39 44.6,15.6 44.6,17.02 43.79,17.83 43.79,21.29 42.77,22.3 42.77,23.11 U$4.10
  Bottom 0.305: v34.85,6.86 30.78,6.86 29.36,5.44 CON1.MOSI | v36.07,14.58 36.27,14.78 43.79,14.78 v44.4,15.39
MOSI1  (via drill 0.5)
  Top 0.305: v35.05,46.48 36.27,47.7 v36.27,54.2 | v44.6,55.02 44.81,55.22 44.81,56.64 43.99,57.45 43.99,60.91 42.98,61.93 42.98,62.74 U$7.10
  Bottom 0.305: v35.05,46.48 30.99,46.48 29.57,45.06 CON2.MOSI | v36.27,54.2 36.47,54.41 43.99,54.41 v44.6,55.02
N$1  (via drill 0.5)
  Top 0.305: v19.81,37.13 18.19,37.13 18.19,37.54 U$5.4
  Bottom 0.305: R5.2 20.42,37.13 v19.81,37.13 | R5.2
N$2  (via drill 0.5)
  Top 0.305: v33.83,29.01 32.61,30.23 Q5.2 | v58.22,19.25 58.22,4.42 JP6.2
  Bottom 0.305: v33.83,29.01 35.66,27.18 50.29,27.18 v58.22,19.25
N$3
  Bottom 0.305: R5.1 27.13,36.12 | 27.13,36.12 28.35,36.12 C16.1 | 27.13,36.12 27.13,32.46 28.55,31.04 39.93,31.04 39.93,33.48 39.52,33.88 38.91,33.88 38.51,34.29 IC2.3
N$4  (via drill 0.5)
  Top 0.305: 30.18,54.61 C22.2 | U$7.17 38.51,57.05 38.51,57.25 37.9,57.86 v37.9,58.06 | v36.27,58.06 34.04,55.83 R7.2 33.83,55.63 33.83,54.61 30.18,54.61 | 30.18,54.61 X1.P$2
  Bottom 0.305: v36.27,58.06 v37.9,58.06
N$5
  Top 0.305: LED1.A 25.5,67.21 25.5,69.65 R6.1
N$6  (via drill 0.5)
  Top 0.305: v60.66,31.24 60.45,31.04 60.45,30.43 U$2.1
  Bottom 0.305: v60.66,31.24 61.06,31.24 61.87,30.43 C4.1
N$7
  Top 0.305: U$7.6 46.02,62.94 45.82,63.14 45.82,63.75 43.59,65.99 C23.2
N$8
  Top 0.61: U$3.GND 88.7,8.89 88.7,8.08 85.04,4.42 60.86,4.42 JP6.1
N$9
  Bottom 0.305: R20.2 81.79,43.03 86.46,47.7 86.46,48.51 U$11.RX1
N$10
  Bottom 0.305: R19.2 81.79,45.47 83.41,47.09 84.23,47.09 85.04,47.9 85.04,48.51 U$11.TX1
N$11
  Bottom 0.305: R11.2 81.58,3.4 86.26,8.08 86.26,8.89 U$3.RX1
N$12
  Bottom 0.305: LED2.A 88.49,57.66 88.49,54.61 R21.1
N$13  (via drill 0.5)
  Top 0.305: v82.19,31.04 82.4,31.24 82.4,35.51 85.85,35.51 86.66,34.7 86.66,32.66 85.65,32.66 U2.2
  Bottom 0.305: v82.19,31.04 83.62,29.62 85.24,29.62 C15.1
N$14
  Bottom 0.305: LED4.A 85.85,57.66 85.85,54.61 R22.1
N$15
  Bottom 0.305: LED5.A 83.41,57.66 83.41,54.61 R23.1
N$16
  Top 0.305: U$4.6 45.82,23.32 45.62,23.52 45.62,24.13 43.38,26.37 C3.2
N$17  (via drill 0.5)
  Top 0.305: v73.25,62.74 71.63,61.11 CFG1.4
  Bottom 0.305: v73.25,62.74 77.72,62.74 78.74,63.75 U$11.CFG
N$18  (via drill 0.5)
  Top 0.305: v60.86,70.87 60.66,70.66 60.66,70.05 U$9.1
  Bottom 0.305: v60.86,70.87 61.26,70.87 62.08,70.05 C27.1
N$19  (via drill 0.5)
  Top 0.305: v82.4,70.66 82.6,70.87 82.6,75.13 86.06,75.13 86.87,74.32 86.87,72.29 85.85,72.29 U1.2
  Bottom 0.305: v82.4,70.66 83.82,69.24 85.45,69.24 C31.1
N$20
  Top 0.305: LED3.A 25.3,27.58 25.3,30.02 R27.1
N$21
  Top 0.61: U$11.GND 88.9,48.51 88.9,47.7 85.24,44.04 61.06,44.04 JP12.1
N$22  (via drill 0.5)
  Top 0.305: v34.04,68.63 32.82,69.85 Q2.2 | v58.42,58.88 58.42,44.04 JP12.2
  Bottom 0.305: v34.04,68.63 35.86,66.8 50.5,66.8 v58.42,58.88
N$23  (via drill 0.5)
  Top 0.305: v20.02,76.76 18.39,76.76 18.39,77.17 U$12.4
  Bottom 0.305: v20.02,76.76 20.62,76.76 R30.2
N$24
  Bottom 0.305: R8.2 81.58,5.84 83.21,7.47 84.02,7.47 84.84,8.28 84.84,8.89 U$3.TX1
N$25
  Bottom 0.305: LED9.A 88.29,18.03 88.29,14.99 R12.1
N$26
  Bottom 0.305: LED11.A 85.65,18.03 85.65,14.99 R14.1
N$27
  Bottom 0.305: LED12.A 83.21,18.03 83.21,14.99 R39.1
N$28
  Bottom 0.305: R30.1 27.33,75.74 | 27.33,75.74 28.55,75.74 C32.1 | 27.33,75.74 27.33,72.09 28.75,70.66 40.13,70.66 40.13,73.1 39.73,73.51 39.12,73.51 38.71,73.91 IC4.3
N$35  (via drill 0.5)
  Top 0.305: v73.05,23.11 71.42,21.49 CFG.4
  Bottom 0.305: v73.05,23.11 77.52,23.11 78.54,24.13 U$3.CFG
N$42  (via drill 0.5)
  Top 0.305: 29.97,14.99 C8.2 | U$4.17 38.3,17.42 38.3,17.63 37.69,18.24 v37.69,18.44 | v36.07,18.44 33.83,16.21 R13.2 33.63,16 33.63,14.99 29.97,14.99 | 29.97,14.99 X3.P$2
  Bottom 0.305: v36.07,18.44 v37.69,18.44
RD_N
  Top 0.305: R31.1 arc90 20.68,20.73 20.68,21.49 arc-90 21.84,22.65 28.55,22.65 arc90 30.64,24.74 30.64,27.58 arc-90 31.29,28.24 41.86,28.24 arc90 43.14,29.51 arc-90 43.89,30.27 46.74,30.27 arc-90 47.8,29.21 47.8,25.15 arc-90 48.1,24.84 48.1,23.34 arc90 U$4.3
RD_N1
  Top 0.305: R18.1 arc90 20.89,60.35 20.89,61.11 arc-90 22.05,62.27 28.75,62.27 arc90 30.84,64.36 30.84,67.21 arc-90 31.5,67.86 42.06,67.86 arc90 43.34,69.14 arc-90 44.09,69.89 46.94,69.89 arc-90 48,68.83 48,64.77 arc-90 48.3,64.47 48.3,62.97 arc90 U$7.3
RD_P
  Top 0.305: R24.1 arc90 21.18,18.05 21.18,21.49 arc-90 21.84,22.16 28.55,22.16 arc90 31.13,24.74 31.13,27.58 arc-90 31.29,27.74 41.86,27.74 arc90 43.63,29.51 arc-90 43.89,29.78 46.74,29.78 arc-90 47.3,29.21 47.3,25.04 arc90 47.61,24.74 47.61,23.41 arc-90 U$4.4
RD_P1
  Top 0.305: R17.1 arc90 21.38,57.67 21.38,61.11 arc-90 22.05,61.78 28.75,61.78 arc90 31.34,64.36 31.34,67.21 arc-90 31.5,67.37 42.06,67.37 arc90 43.83,69.14 arc-90 44.09,69.4 46.94,69.4 arc-90 47.5,68.83 47.5,64.67 arc90 47.81,64.36 47.81,63.03 arc-90 U$7.4
RESET  (via drill 0.5)
  Top 0.305: v37.69,20.47 39.93,20.47 U$4.13 | v24.89,20.27 25.1,20.07 v25.1,5.84 | v42.37,4.22 42.37,2.59 RESET1.2
  Bottom 0.305: 42.37,3.61 44.4,3.61 R15.1 44.6,3.61 48.06,3.61 48.26,3.4 C9.1 | 42.37,3.61 40.54,3.61 39.12,2.18 29.97,2.18 28.14,4.01 CON1.RESET 27.94,4.22 27.53,4.62 26.31,4.62 v25.1,5.84 | v37.69,20.47 37.49,20.27 v24.89,20.27 | 42.37,3.61 v42.37,4.22
RESET1  (via drill 0.5)
  Top 0.305: v37.9,60.1 40.13,60.1 U$7.13 | v25.1,59.89 25.3,59.69 v25.3,45.47 | v42.57,43.84 42.57,42.21 RESET2.2
  Bottom 0.305: 42.57,43.23 44.6,43.23 R16.1 44.81,43.23 48.26,43.23 48.46,43.03 C25.1 | 42.57,43.23 40.74,43.23 39.32,41.81 30.18,41.81 28.35,43.64 CON2.RESET 28.14,43.84 27.74,44.25 26.52,44.25 v25.3,45.47 | v37.9,60.1 37.69,59.89 v25.1,59.89 | 42.57,43.23 v42.57,43.84
RX  (via drill 0.5)
  Top 0.305: v52.32,2.39 51.1,1.17 38.3,1.17 38.3,14.38 38.91,14.99 39.93,14.99 U$4.20
  Bottom 0.305: v52.32,2.39 76.3,2.39 79.55,5.64 R8.1
RX1  (via drill 0.5)
  Top 0.305: v52.53,42.01 51.31,40.79 38.51,40.79 38.51,54 39.12,54.61 40.13,54.61 U$7.20
  Bottom 0.305: v52.53,42.01 76.5,42.01 79.76,45.26 R19.1
SCK  (via drill 0.5)
  Top 0.305: v34.85,3 36.88,5.03 36.88,22.5 40.74,26.37 41.96,26.37 41.96,25.15 42.77,24.33 43.38,24.33 43.38,23.32 U$4.9
  Bottom 0.305: v34.85,3 30.38,3 29.36,4.01 CON1.SCK
SCK1  (via drill 0.5)
  Top 0.305: v35.05,42.62 37.08,44.65 37.08,62.13 40.94,65.99 42.16,65.99 42.16,64.77 42.98,63.96 43.59,63.96 43.59,62.94 U$7.9
  Bottom 0.305: v35.05,42.62 30.58,42.62 29.57,43.64 CON2.SCK
SCL  (via drill 0.5)
  Top 0.305: v37.69,16.81 39.93,16.81 U$4.18 | R9.2 54.76,28.6 53.34,27.18 53.34,22.91 v53.95,22.3 58.01,22.3 58.01,21.69 60.45,19.25 65.53,19.25 65.53,24.13 67.36,25.96 67.36,31.65 67.26,31.75 | 88.19,34.39 88.29,34.49 94.79,34.49 94.79,33.68 JP13.2 92.46,31.24 92.46,27.38 79.55,27.38 78.74,28.19 78.74,29.41 76.91,29.41 U$1.6 | 88.19,34.39 88.09,34.29 88.09,33.88 U2.8 | 67.26,31.75 68.17,32.66 68.17,36.93 69.8,38.56 88.09,38.56 88.09,34.49 88.19,34.39 | 67.26,31.75 65.94,30.43 U$2.8
  Bottom 0.305: v37.69,16.81 37.9,17.02 48.67,17.02 v53.95,22.3
SCL1  (via drill 0.5)
  Top 0.305: v37.9,56.44 40.13,56.44 U$7.18 | R26.2 54.97,68.22 53.54,66.8 53.54,62.53 v54.15,61.93 58.22,61.93 58.22,61.32 60.66,58.88 65.74,58.88 65.74,63.75 67.56,65.58 67.56,71.27 67.46,71.37 | 88.39,74.02 88.49,74.12 95,74.12 95,73.3 JP14.2 92.66,70.87 92.66,67.01 79.76,67.01 78.94,67.82 78.94,69.04 77.11,69.04 U$8.6 | 88.39,74.02 88.29,73.91 88.29,73.51 U1.8 | 67.46,71.37 68.38,72.29 68.38,76.56 70,78.18 88.29,78.18 88.29,74.12 88.39,74.02 | 67.46,71.37 66.14,70.05 U$9.8
  Bottom 0.305: v37.9,56.44 38.1,56.64 48.87,56.64 v54.15,61.93
SDA  (via drill 0.5)
  Top 0.305: U$1.5 76.91,28.19 78.33,26.77 92.96,26.77 92.96,29.01 95,31.04 JP13.3 | v37.69,15.8 39.93,15.8 U$4.19 | 62.79,22 61.67,23.11 R2.1 | 62.79,22 v63.09,21.69 | U$2.7 62.89,29.01 62.89,22.1 62.79,22 | U2.7 91.02,32.58 v91.14,32.46
  Bottom 0.305: v37.69,15.8 37.29,15.39 35.66,15.39 35.26,14.99 35.26,13.77 55.17,13.77 v63.09,21.69 67.16,25.76 89.71,25.76 95,31.04 JP13.3 93.83,32.46 v91.14,32.46
SDA1  (via drill 0.5)
  Top 0.305: U$8.5 77.11,67.82 78.54,66.4 93.17,66.4 93.17,68.63 95.2,70.66 JP14.3 | v37.9,55.42 40.13,55.42 U$7.19 | 62.99,61.62 61.87,62.74 R25.1 | 62.99,61.62 v63.3,61.32 | U$9.7 63.09,68.63 63.09,61.72 62.99,61.62 | U1.7 91.22,72.2 v91.34,72.09
  Bottom 0.305: v37.9,55.42 37.49,55.02 35.86,55.02 35.46,54.61 35.46,53.39 55.37,53.39 v63.3,61.32 67.36,65.38 89.92,65.38 95.2,70.66 JP14.3 94.03,72.09 v91.34,72.09
TX  (via drill 0.5)
  Top 0.305: v40.13,1.98 40.34,2.18 40.34,8.89 38.91,10.31 38.91,14.17 39.93,14.17 U$4.21
  Bottom 0.305: v40.13,1.98 40.54,1.57 77.93,1.57 79.55,3.2 R11.1
TX1  (via drill 0.5)
  Top 0.305: v40.34,41.61 40.54,41.81 40.54,48.51 39.12,49.94 39.12,53.8 40.13,53.8 U$7.21
  Bottom 0.305: v40.34,41.61 40.74,41.2 78.13,41.2 79.76,42.82 R20.1
VCC  (via drill 0.5)
  Top 0.305: v50.5,8.69 50.5,12.34 51.51,13.36 U$4.34 | U$4.44 51.51,21.49 49.89,21.49 49.07,22.3 49.07,23.11 U$4.2 48.87,23.32 v48.87,25.55 | 41.15,19.86 40.13,19.86 U$4.14 | 41.15,19.86 41.76,19.86 42.57,19.05 42.57,11.73 U$4.24 42.77,11.53 42.77,10.72 v44.81,8.69 | 41.15,19.86 v41.15,25.55 | v13.51,30.23 19,30.23 C5.1 | v11.28,30.23 9.65,30.23 9.65,30.02 IC1.3
  Bottom 0.305: v50.5,8.69 46.63,8.69 45.72,7.77 | 44.7,6.76 44.6,6.65 44.6,5.84 R15.2 | 44.7,6.76 45.72,7.77 | v41.15,25.55 v48.87,25.55 | v44.81,8.69 45.72,7.77 | v13.51,30.23 v11.28,30.23 1.93,20.88 1.93,0.97 11.68,0.97 12.9,2.18 D3.C 13.11,2.18 13.11,3.4 | 13.11,3.4 13.11,4.62 D2.C 13.11,4.83 13.11,7.26 | 13.11,3.4 16.56,3.4 C10.1 16.76,3.4 20.42,3.4 C12.2 | 44.7,6.76 43.79,7.67 17.78,7.67 16.97,8.48 14.33,8.48 13.11,7.26 | 13.11,7.26 D4.C
VCC1  (via drill 0.5)
  Top 0.305: v50.7,48.31 50.7,51.97 51.71,52.98 U$7.34 | U$7.44 51.71,61.11 50.09,61.11 49.28,61.93 49.28,62.74 U$7.2 49.07,62.94 v49.07,65.18 | 41.35,59.49 40.34,59.49 U$7.14 | 41.35,59.49 41.96,59.49 42.77,58.67 42.77,51.36 U$7.24 42.98,51.16 42.98,50.34 v45.01,48.31 | 41.35,59.49 v41.35,65.18 | v13.72,69.85 19.2,69.85 C17.1 | v11.48,69.85 9.86,69.85 9.86,69.65 IC3.3
  Bottom 0.305: v50.7,48.31 46.84,48.31 45.92,47.4 | 44.91,46.38 44.81,46.28 44.81,45.47 R16.2 | 44.91,46.38 45.92,47.4 | v41.35,65.18 v49.07,65.18 | v45.01,48.31 45.92,47.4 | v13.72,69.85 v11.48,69.85 2.13,60.5 2.13,40.59 11.89,40.59 13.11,41.81 D5.C 13.31,41.81 13.31,43.03 | 13.31,43.03 13.31,44.25 D1.C 13.31,44.45 13.31,46.89 | 13.31,43.03 16.76,43.03 C19.1 16.97,43.03 20.62,43.03 C20.2 | 44.91,46.38 43.99,47.29 17.98,47.29 17.17,48.11 14.53,48.11 13.31,46.89 | 13.31,46.89 D6.C
VUSB  (via drill 0.5)
  Top 0.305: v8.84,8.28 5.99,8.28 5.99,13.56 6.2,13.77 6.2,17.42 6.4,17.63 8.03,17.63 X4.1 8.23,17.83 v9.04,18.64 | v44.6,18.24 44.6,19.46 45.01,19.86 45.01,23.11 U$4.7
  Bottom 0.305: v8.84,8.28 9.86,7.26 D4.A | v44.6,18.24 43.99,17.63 16.76,17.63 C7.2 16.56,17.63 10.06,17.63 v9.04,18.64
VUSB1  (via drill 0.5)
  Top 0.305: v9.04,47.9 6.2,47.9 6.2,53.19 6.4,53.39 6.4,57.05 6.6,57.25 8.23,57.25 X2.1 8.43,57.45 v9.25,58.27 | v44.81,57.86 44.81,59.08 45.21,59.49 45.21,62.74 U$7.7
  Bottom 0.305: v9.04,47.9 10.06,46.89 D6.A | v44.81,57.86 44.2,57.25 16.97,57.25 C24.2 16.76,57.25 10.26,57.25 v9.25,58.27
XTAL1  (via drill 0.5)
  Top 0.305: 29.97,20.07 C2.2 | v37.69,19.46 37.9,19.46 38.51,18.85 38.51,18.24 39.93,18.24 U$4.16 | 33.83,19.46 v35.46,19.46 | 33.83,19.46 33.83,19.05 R13.1 33.83,19.46 | 29.97,20.07 33.83,20.07 33.83,19.46 | 29.97,20.07 X3.P$1
  Bottom 0.305: v35.46,19.46 v37.69,19.46
XTAL2  (via drill 0.5)
  Top 0.305: 30.18,59.69 C21.2 | v37.9,59.08 38.1,59.08 38.71,58.47 38.71,57.86 40.13,57.86 U$7.16 | 34.04,59.08 v35.66,59.08 | 34.04,59.08 34.04,58.67 R7.1 34.04,59.08 | 30.18,59.69 34.04,59.69 34.04,59.08 | 30.18,59.69 X1.P$1
  Bottom 0.305: v35.66,59.08 v37.9,59.08

## Text on the board
tNames: 1 | 1 | Solar Decathlon v1.1 | 1 | 1 | Solar Decathlon v1.1
bNames: USB | TX/RX | LINKLED
tValues: GND_CTRL SDA SCL 3.3V | GND_CTRL SDA SCL 3.3V
_tNames: JP4 | JP2 | JP3 | R4 | U$6 | U2 | Q5 | U$5 | U$1 | C5 | C1 | R27 | LED3 | R9 | IC1 | C3 | R2 | X4 | C2 | U$4 | U$3 | R13 | C11 | CFG | R31 | C8 | X3 | R3 | R24 | Q3 | JP1 | RESET1 | JP6 | JP4 | JP2 | JP3 | U$6 | R4 | U2 | U$5 | Q5 | U$1 | C5 | C1 | R27 | LED3 | R9 | IC1 | C3 | R2 | X4 | C2 | U$4 | U$3 | R13 | R31 | C11 | CFG | C8 | X3 | R3 | R24 | Q3 | RESET1 | JP1 | JP6
_bNames: R5 | IC2 | C16 | C13 | JP5 | C14 | C4 | C15 | C6 | LED12 | LED11 | LED9 | C7 | R39 | R14 | R12 | D4 | C12 | CON1 | R8 | D2 | C10 | R15 | C9 | R11 | D3 | R5 | IC2 | C16 | JP5 | C13 | C14 | C4 | C15 | C6 | LED12 | LED11 | LED9 | C7 | R39 | R14 | R12 | D4 | C12 | CON1 | R15 | R8 | D2 | C10 | C9 | R11 | D3
203bmp: C:/Users/G/Pictures/logo_epfl.bmp